# EAGLE board main_board_prev (EAGLE 8.2.2)
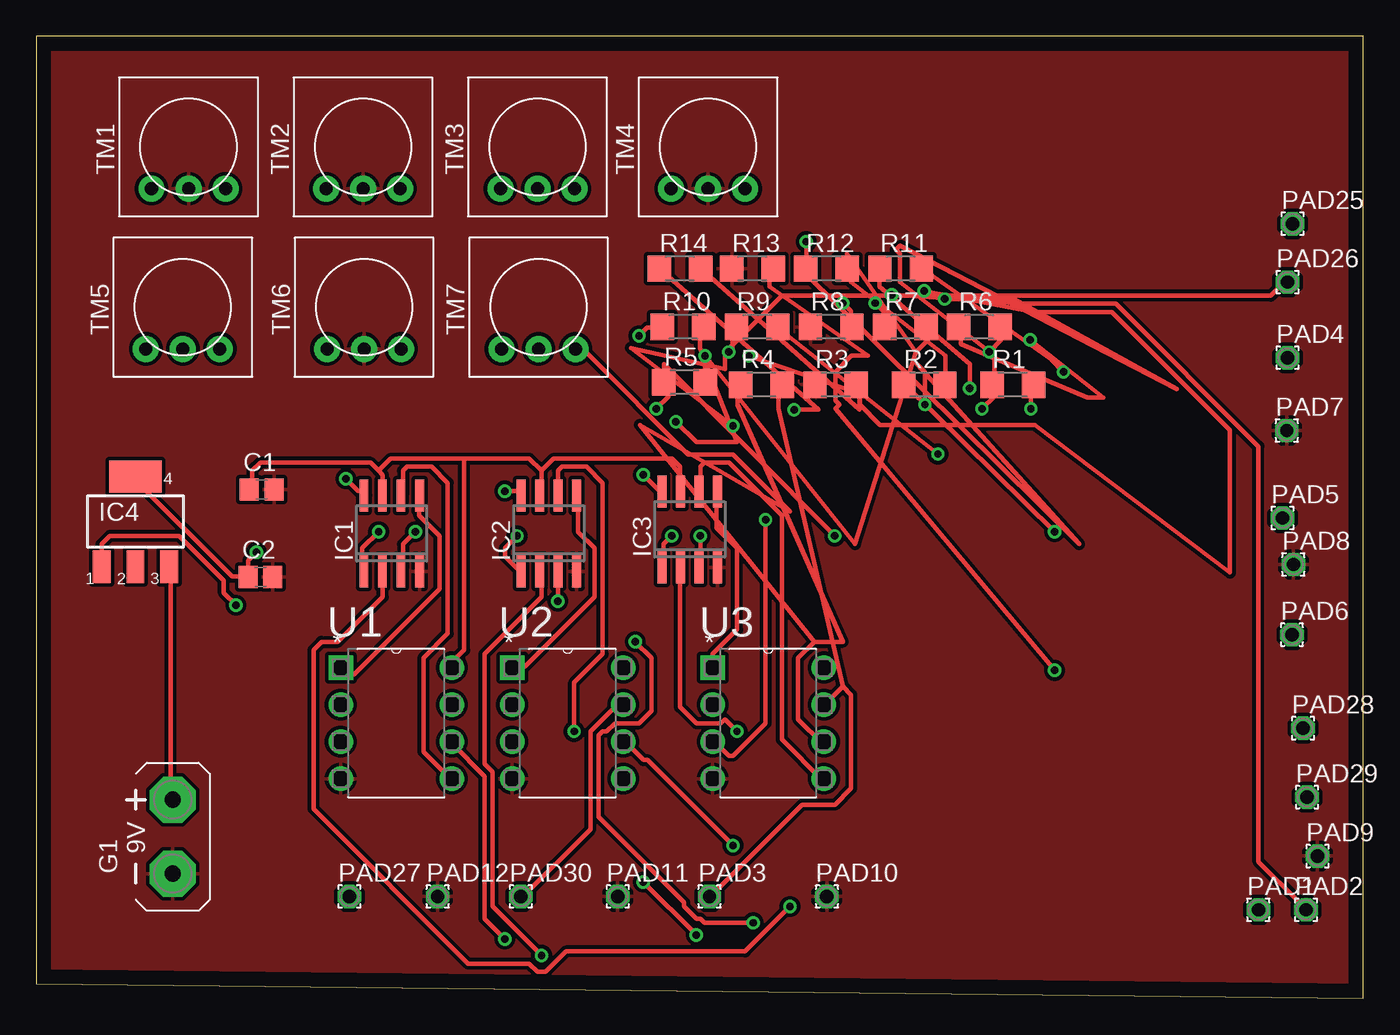
[diagram p0: board, top side]
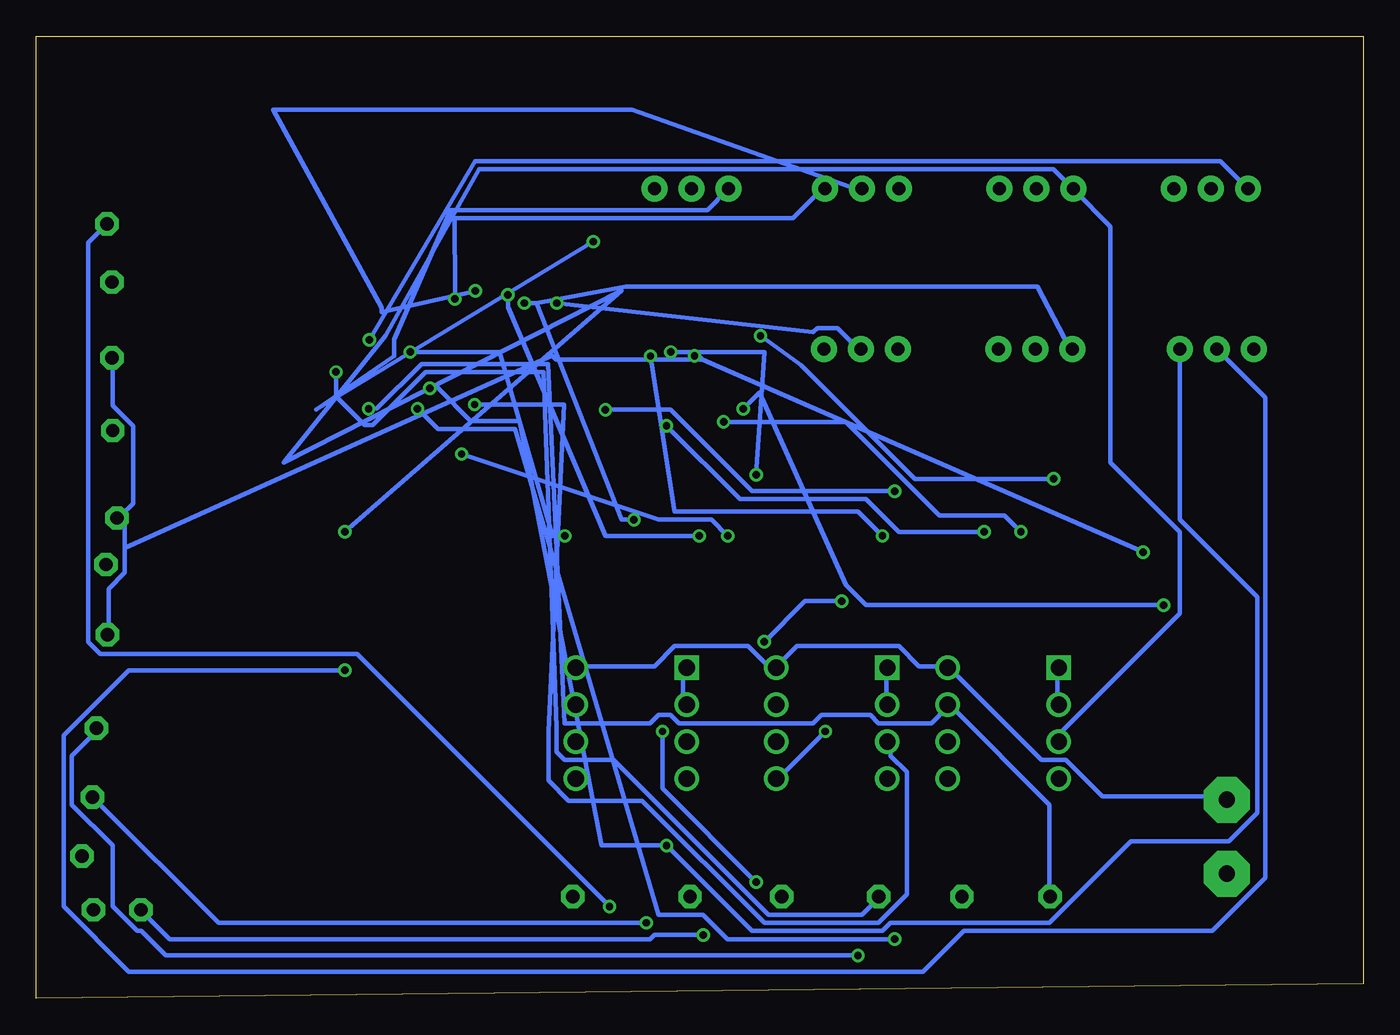
[diagram p1: board, bottom side, seen from below]

Size 91 x 66 mm. Coordinates in mm from the lower left corner, seen from the top.
Outline: 0,1 91,0 91,66 0,66 0,1
Copper layers (1*16): Top 0.035mm / dielectric 1.5mm / Bottom 0.035mm
Design rules "default": minimum track width 6mil, minimum drill 0.35mm, track to track 6mil, track to pad 6mil, pad to pad 6mil, via to via 6mil, smd to smd 6mil, copper to edge 40mil, drill to drill 6mil, minimum pad ring 10mil, minimum via ring 8mil, stop-mask expansion 4mil, vias tented up to drill 0mil, thermal gap 10mil
Net classes: 0 default: width 0.305 mm, drill 0.508 mm, clearance 0.254 mm

## Footprints (pad centres in the part's own frame; a part is rotated, then mirrored left to right if it is on the bottom)
C2012 = smd 1.3 x 1.5: 1 -0.85,0; 2 0.85,0
AB9V = drill 1.118 pad 3.15 octagon: + 0,2.54; - 0,-2.54
SOIC8 = smd 0.6 x 2.2: 1 -1.905,-2.6; 2 -0.635,-2.6; 3 0.635,-2.6; 4 1.905,-2.6; 5 1.905,2.6; 6 0.635,2.6; 7 -0.635,2.6; 8 -1.905,2.6
SOT223 = smd 1.219 x 2.235: 1 -2.311,-3.099; 2 0,-3.099; 3 2.311,-3.099 | smd 3.6 x 2.2: 4 0,3.099
1,6/0,9 = drill 0.914 pad 1.6 octagon: 1 0,0
R1206 = smd 1.6 x 1.803: 1 -1.422,0; 2 1.422,0
TRIM-3386 = drill 0.9 pad 1.778: 1 -2.54,-2.857; 2 0,-2.857; 3 2.54,-2.857
DIP254P762X508-8 = drill 1.118 square: 1 -7.62,7.62 | drill 1.118: 2 -7.62,5.08; 3 -7.62,2.54; 4 -7.62,0; 5 0,0; 6 0,2.54; 7 0,5.08; 8 0,7.62

## Placement (x,y rotation side)
C1  [C2012]  15.44,34.91 0 top
C2  [C2012]  15.36,28.91 0 top
G1  AB9V  [AB9V]  9.35,11.1 0 top
IC1  LT1168ACS8  [SOIC8]  24.37,31.91 0 top
IC2  LT1168ACS8  [SOIC8]  35.15,31.91 0 top
IC3  LT1168ACS8  [SOIC8]  44.82,32.18 0 top
IC4  317EMP  [SOT223]  6.79,32.72 0 top
PAD1  [1,6/0,9]  83.82,6.08 0 top
PAD2  [1,6/0,9]  87.09,6.08 0 top
PAD3  [1,6/0,9]  46.17,7 0 top
PAD4  [1,6/0,9]  85.82,43.96 0 top
PAD5  [1,6/0,9]  85.47,32.96 0 top
PAD6  [1,6/0,9]  86.12,24.96 0 top
PAD7  [1,6/0,9]  85.77,38.96 0 top
PAD8  [1,6/0,9]  86.22,29.77 0 top
PAD9  [1,6/0,9]  87.87,9.77 0 top
PAD10  [1,6/0,9]  54.22,7 0 top
PAD11  [1,6/0,9]  39.87,7 0 top
PAD12  [1,6/0,9]  27.52,7 0 top
PAD25  [1,6/0,9]  86.17,53.15 0 top
PAD26  [1,6/0,9]  85.82,49.15 0 top
PAD27  [1,6/0,9]  21.47,7 0 top
PAD28  [1,6/0,9]  86.88,18.54 0 top
PAD29  [1,6/0,9]  87.15,13.81 0 top
PAD30  [1,6/0,9]  33.22,7 0 top
R1  [R1206]  66.98,42.11 0 top
R2  [R1206]  60.9,42.11 0 top
R3  [R1206]  54.82,42.11 0 top
R4  [R1206]  49.74,42.11 0 top
R5  [R1206]  44.46,42.27 0 top
R6  [R1206]  64.68,46.07 0 top
R7  [R1206]  59.6,46.07 0 top
R8  [R1206]  54.52,46.07 0 top
R9  [R1206]  49.44,46.07 0 top
R10  [R1206]  44.36,46.07 0 top
R11  [R1206]  59.28,50.07 0 top
R12  [R1206]  54.2,50.07 0 top
R13  [R1206]  49.12,50.07 0 top
R14  [R1206]  44.15,50.07 0 top
TM1  [TRIM-3386]  10.43,58.42 0 top
TM2  [TRIM-3386]  22.4,58.42 0 top
TM3  [TRIM-3386]  34.37,58.42 0 top
TM4  [TRIM-3386]  46.07,58.42 0 top
TM5  [TRIM-3386]  10.04,47.42 0 top
TM6  [TRIM-3386]  22.47,47.42 0 top
TM7  [TRIM-3386]  34.44,47.42 0 top
U1  TLC272IP  [DIP254P762X508-8]  28.49,15.08 0 top
U2  TLC272IP  [DIP254P762X508-8]  40.25,15.08 0 top
U3  TLC272IP  [DIP254P762X508-8]  54.01,15.08 0 top

## Library data of the parts
C1 C2 = eagle-ltspice; SPICEMODEL: NONE; SPICEPREFIX: C
G1 = battery
IC1-IC3 = linear-technology; MPN: LT1168ACS8; OC_FARNELL: unknown; OC_NEWARK: 57M2316
IC4 = linear
PAD1-PAD12 PAD25-PAD30 = wirepad
R1-R14 TM1-TM7 = adafruit
U1-U3 = Texas Instruments_By_element14_Batch_1; MPN: TLC272IP; OC_FARNELL: 2386835; OC_NEWARK: 08F9090; PACKAGE: PDIP; SUPPLIER: Texas Instruments

## Nets
GND: C1.2 C2.2 G1.- IC1.4 IC2.4 IC3.4 PAD7.1 PAD8.1 PAD9.1 PAD10.1 PAD11.1 PAD12.1 R3.1 R8.1 R13.1 TM1.2 TM2.2 TM4.2 TM6.2 U1.4 U2.4 U3.4
N$1: PAD27.1 R1.2 U1.7
N$2: R1.1 TM3.3 U1.6
N$3: R2.1 TM2.1 U1.3
N$4: IC1.5 U1.1 U1.2
N$5: R3.2 TM3.2
N$6: IC4.1 R5.1 R6.2
N$7: PAD3.1 R4.2 U3.7
N$8: R4.1 TM7.3 U3.6
N$9: IC3.5 U3.1 U3.2
N$10: R6.1 TM1.1
N$11: R7.1 TM6.1 U3.3
N$12: IC3.1 R9.2
N$13: R8.2 TM7.2
N$14: IC3.8 R9.1
N$15: IC3.6 U3.5
N$16: IC1.1 R10.2
N$17: IC3.3 PAD2.1
N$18: IC3.2 PAD1.1
N$19: IC1.8 R10.1
N$20: IC1.6 U1.5
N$21: IC1.3 PAD26.1
N$22: IC1.2 PAD25.1
N$23: PAD30.1 R11.2 U2.7
N$24: R11.1 TM5.3 U2.6
N$25: R12.1 TM4.1 U2.3
N$26: IC2.5 U2.1 U2.2
N$27: R13.2 TM5.2
N$28: IC2.1 R14.2
N$29: IC2.8 R14.1
N$30: IC2.6 U2.5
N$31: IC2.3 PAD29.1
N$32: IC2.2 PAD28.1
VCC: C1.1 G1.+ IC1.7 IC2.7 IC3.7 IC4.3 U1.8 U2.8 U3.8
VDD: C2.1 IC4.4 PAD4.1 PAD5.1 PAD6.1 R2.2 R5.2 R7.2 R12.2

## Tracks (layer width: path | path; a pad name or v marks a point on that pad's centre or on a via)
GND
  pour Top: -5,83 -5,-3 105,-3 105,81 103,83
N$1  (via drill 0.51)
  Top 0.305: v68.21,40.46 68.21,41.86 R1.2
  Bottom 0.305: v68.21,40.46 67.65,40.46 64.58,43.54 55.92,43.54 54.76,18.88 48.9,18.88 48.34,19.44 47.5,19.44 46.94,18.88 37.72,18.88 37.16,19.44 33.81,19.44 33.25,18.88 29.62,18.88 28.5,20 U1.7 28.22,20 21.51,13.29 21.51,7.15 PAD27.1
N$2  (via drill 0.51)
  Top 0.305: v62.29,47.98 67.04,47.98 78.23,41.79 59.23,51.65 58.95,51.37 59.23,51.09 59.23,49.13 65.7,44.1 65.7,42.14 R1.1 65.7,41.86 65.7,41.3 v64.86,40.46 | v32.13,4.07 30.73,5.47 30.73,15.25 28.5,17.48 U1.6
  Bottom 0.305: v62.29,47.98 62.29,48.54 62.31,53.53 39.12,53.53 37.16,55.48 TM3.3 | v32.13,4.07 43.59,4.07 45.26,5.75 48.34,5.75 58.15,39.07 63.46,39.07 v64.86,40.46
N$3  (via drill 0.51)
  Top 0.305: v69.85,32.01 59.55,42.14 R2.1
  Bottom 0.305: v69.85,32.01 50.85,48.57 74.04,36.76 67.04,45.47 60.63,56.88 21.23,56.88 20.12,55.76 TM2.1 19.84,55.48 17.32,52.97 17.32,36.76 12.57,32.01 12.57,26.43 20.68,18.32 20.68,17.76 U1.3
N$4
  Top 0.305: IC1.5 26.26,34.25 26.26,33.13 27.66,31.73 27.66,28.1 21.79,22.23 21.23,22.23 20.95,22.51 U1.1
  Bottom 0.305: U1.2 20.95,20.28 20.95,22.51 U1.1
N$5  (via drill 0.51)
  Top 0.305: v60.89,48.54 68.45,47.1 73.76,47.1 81.86,39 81.86,29.22 68.49,39.35 57.87,39.35 56.48,40.74 56.48,41.86 R3.2
  Bottom 0.305: v60.89,48.54 67.33,47.1 67.33,47.38 74.75,60.97 50.16,60.97 34.65,55.48 TM3.2
N$6  (via drill 0.51)
  Top 0.305: v54.76,31.73 43.06,43.54 43.06,42.42 R5.1 43.06,42.14 43.34,41.86 43.34,41.3 v42.51,40.46 | v65.36,44.35 66.2,45.19 66.2,46.03 R6.2 | v13.69,26.98 12.85,27.82 12.85,28.66 9.78,31.73 5.03,31.73 4.47,31.18 4.47,29.78 IC4.1
  Bottom 0.305: v54.76,31.73 55.6,31.73 59.22,44.35 v65.36,44.35 | v13.69,26.98 34.09,26.98 35.48,28.38 41.39,41.58 v42.51,40.46
N$7
  Top 0.305: 55.32,21.4 54.2,20.28 U3.7 | 55.32,21.4 50.89,40.46 50.89,41.86 R4.2 | 55.32,21.4 55.88,20.84 55.88,14.41 54.76,13.29 52.53,13.29 46.38,7.15 PAD3.1
N$8
  Top 0.305: 53.37,24.47 55.32,24.47 48.09,40.74 48.09,41.86 R4.1 | 53.37,24.47 52.25,23.35 52.25,19.16 53.92,17.48 U3.6 | 53.37,24.47 41.39,39.35 51.69,33.41 47.78,37.32 44.7,37.32 37.72,44.31 37.16,44.31 TM7.3
N$9
  Top 0.305: IC3.5 46.66,34.53 46.66,32.29 48.06,30.9 48.06,25.31 46.38,23.63 46.38,22.79 U3.1
  Bottom 0.305: U3.2 46.66,20.28 46.66,22.51 U3.1
N$10  (via drill 0.51)
  Top 0.305: v68.16,45.19 73.2,41.23 72.08,41.23 63.41,44.91 63.41,46.03 R6.1
  Bottom 0.305: v68.16,45.19 60.91,57.44 9.78,57.44 8.1,55.76 TM1.1
N$11  (via drill 0.51)
  Top 0.305: v57.54,47.7 58.1,47.15 58.1,46.31 R7.1 | v50.01,32.85 50.01,18.88 47.78,16.65 47.5,16.65 46.66,17.48 U3.3
  Bottom 0.305: 56.7,47.7 v57.54,47.7 | 56.7,47.7 50.59,48.82 22.35,48.82 20.12,44.59 TM6.1 | v50.01,32.85 50.85,32.85 56.7,47.7
N$12  (via drill 0.51)
  Top 0.305: v61.84,37.35 50.84,46.03 R9.2 | v43.59,31.73 43.03,31.18 43.03,29.78 IC3.1
  Bottom 0.305: v61.84,37.35 48.34,32.85 44.7,32.85 v43.59,31.73
N$13  (via drill 0.51)
  Top 0.305: v55.31,47.7 55.87,47.15 55.87,46.31 R8.2
  Bottom 0.305: v55.31,47.7 37.72,45.7 37.44,45.98 36.04,45.98 34.65,44.59 TM7.2
N$14  (via drill 0.51)
  Top 0.305: v47.48,44.35 47.76,44.63 47.76,46.03 R9.1 | v41.63,35.92 42.75,34.81 IC3.8
  Bottom 0.305: v47.48,44.35 41.06,44.35 v41.63,35.92
N$15
  Top 0.305: IC3.6 45.54,34.81 45.54,36.48 45.82,36.76 47.5,36.76 51.13,33.13 51.13,17.76 53.92,14.97 U3.5
N$16  (via drill 0.51)
  Top 0.305: v43.87,39.56 45.26,38.16 48.06,38.16 45.53,44.63 45.53,46.03 R10.2 | v23.47,32.01 22.35,30.9 22.35,29.5 IC1.1
  Bottom 0.305: v43.87,39.56 35.48,39.56 29.06,33.13 24.59,33.13 v23.47,32.01
N$17  (via drill 0.51)
  Top 0.305: v45.54,31.73 45.54,29.78 IC3.3 | v58.66,48.26 59.22,48.26 67.61,47.66 74.04,47.66 83.82,37.88 83.82,9.38 86.61,6.59 86.89,6.59 87.17,6.31 PAD2.1
  Bottom 0.305: v45.54,31.73 51.97,31.73 58.66,47.42 v58.66,48.26
N$18  (via drill 0.51)
  Top 0.305: v48.06,18.32 47.22,19.16 46.94,18.88 45.26,18.88 44.15,20 44.15,29.5 IC3.2 | v45.26,4.35 v41.63,7.99
  Bottom 0.305: v48.06,18.32 48.06,14.41 v41.63,7.99 | v45.26,4.35 48.62,4.35 48.9,4.07 81.86,4.07 83.82,6.03 PAD1.1
N$19  (via drill 0.51)
  Top 0.305: v41.34,45.47 41.9,46.03 42.73,46.03 R10.1 | v21.23,35.65 22.07,34.81 22.35,34.81 22.63,34.53 IC1.8
  Bottom 0.305: v41.34,45.47 38.56,43.47 30.73,35.65 v21.23,35.65
N$20
  Top 0.305: IC1.6 25.15,34.53 25.15,36.2 25.43,36.48 27.1,36.48 28.22,35.37 28.22,25.03 26.54,23.35 26.54,16.93 27.94,15.53 28.22,15.53 28.5,15.25 U1.5
N$21  (via drill 0.51)
  Top 0.305: v25.98,32.01 25.15,31.18 25.15,29.5 IC1.3 | v47.78,39.28 40.78,44.63 47.22,43.19 47.22,44.31 51.13,48.22 84.66,48.22 85.78,49.34 PAD26.1
  Bottom 0.305: v25.98,32.01 31.85,32.01 34.09,34.25 42.75,34.25 v47.78,39.28
N$22  (via drill 0.51)
  Top 0.305: v51.69,6.31 48.62,3.23 36.32,3.23 34.92,1.84 34.37,1.84 33.81,2.4 29.62,2.4 19,13.01 19,23.91 19.56,24.47 20.68,24.47 23.75,27.54 23.75,29.22 IC1.2
  Bottom 0.305: v51.69,6.31 69.01,23.63 86.61,23.63 87.45,24.47 87.45,51.85 86.33,52.97 PAD25.1
N$23  (via drill 0.51)
  Top 0.305: v70.45,42.98 69.61,43.82 60.91,49.97 R11.2 | U2.7 40.23,20 39.67,20 38,18.32 38,11.62 33.25,6.87 PAD30.1
  Bottom 0.305: v70.45,42.98 70.45,41.3 68.49,39.35 67.93,39.35 64.3,42.98 56.2,42.98 55.32,18.6 55.32,16.93 54.76,16.37 51.41,16.37 40.79,5.75 34.37,5.75 33.25,6.87 PAD30.1
N$24  (via drill 0.51)
  Top 0.305: v64.02,41.86 64.02,43.54 57.84,48.85 57.84,49.97 R11.1 | v47.78,10.5 41.91,16.37 41.63,16.37 40.51,17.48 U2.6
  Bottom 0.305: v64.02,41.86 63.46,41.86 61.23,39.62 57.87,39.62 52.25,10.5 v47.78,10.5 41.91,4.63 32.97,4.63 32.41,5.19 21.51,5.19 15.93,10.78 9.22,10.78 7.26,12.73 7.26,27.54 12.57,32.85 12.57,44.31 TM5.3
N$25  (via drill 0.51)
  Top 0.305: v52.81,51.92 52.81,50.25 R12.1 52.53,49.97 71.53,31.18 60.39,43.54 60.95,42.98 v60.95,40.74
  Bottom 0.305: v52.81,51.92 71.81,40.4 66.48,44.07 66.48,45.19 62.59,54.09 44.98,54.09 43.59,55.48 TM4.1 | v60.95,40.74 54.8,40.74 55.88,18.32 55.88,14.97 54.48,13.57 49.45,13.57 41.07,5.19 33.25,5.19 31.29,7.15 31.29,15.53 32.41,16.65 32.41,17.48 U2.3
N$26
  Top 0.305: IC2.5 37.16,34.25 37.16,32.01 38.28,30.9 38.28,27.54 33.53,22.79 32.69,22.79 U2.1
  Bottom 0.305: U2.2 32.69,20.28 32.69,22.51 U2.1
N$27  (via drill 0.51)
  Top 0.305: v69.85,22.51 54.8,40.46 55.08,40.74 54.8,41.02 54.8,42.98 55.92,44.1 57.03,44.1 50.29,48.85 50.29,49.97 R13.2
  Bottom 0.305: v69.85,22.51 84.66,22.51 89.13,18.04 89.13,6.31 84.66,1.84 30.18,1.84 27.38,4.63 10.34,4.63 6.71,8.26 6.71,41.23 9.78,44.31 TM5.2
N$28  (via drill 0.51)
  Top 0.305: v48.88,44.07 56.44,41.51 56.44,40.4 R14.2 | v32.97,31.73 32.13,30.9 32.13,30.34 32.97,29.5 IC2.1
  Bottom 0.305: v48.88,44.07 47.22,33.41 34.65,33.41 v32.97,31.73
N$29  (via drill 0.51)
  Top 0.305: v51.97,40.4 53.65,40.4 R14.1 | v32.13,34.81 33.25,34.81 33.25,34.53 IC2.8
  Bottom 0.305: v51.97,40.4 47.5,40.4 41.91,34.81 v32.13,34.81
N$30  (via drill 0.51)
  Top 0.305: v36.88,18.32 36.88,21.68 38.84,23.63 38.84,35.37 37.72,36.48 36.04,36.48 35.76,36.2 35.76,34.53 IC2.6
  Bottom 0.305: v36.88,18.32 40.23,14.97 U2.5
N$31  (via drill 0.51)
  Top 0.305: v35.76,27.26 35.76,29.22 IC2.3 | v41.07,24.47 42.19,23.35 42.19,19.72 41.35,18.88 39.67,18.88 39.12,18.32 38.84,18.32 38.56,18.04 38.56,12.46 44.42,6.59 44.42,6.31 45.26,5.47 45.54,5.47 45.82,5.19 v49.17,5.19
  Bottom 0.305: v35.76,27.26 38.28,27.26 v41.07,24.47 | v49.17,5.19 78.51,5.19 86.89,13.57 PAD29.1
N$32  (via drill 0.51)
  Top 0.305: v34.65,2.96 31.29,6.31 31.29,15.53 30.73,16.09 30.73,23.63 34.65,27.54 34.65,29.22 IC2.2
  Bottom 0.305: v34.65,2.96 82.14,2.96 83.82,4.63 84.1,4.63 85.78,6.31 85.78,10.5 88.57,13.29 88.57,16.65 86.89,18.32 PAD28.1
VCC
  Top 0.305: 23.47,36.2 23.75,35.92 23.75,34.53 IC1.7 | 23.47,36.2 22.91,36.76 15.37,36.76 14.81,36.2 14.81,35.09 C1.1 | 34.65,36.2 34.65,34.53 IC2.7 | 34.65,36.2 33.81,37.04 29.34,37.04 | 29.34,37.04 24.31,37.04 23.47,36.2 | 34.65,36.2 35.48,37.04 43.59,37.04 44.15,36.48 44.15,34.81 IC3.7 | IC4.3 9.22,29.5 9.22,13.85 G1.+ | 29.34,37.04 29.34,23.91 28.22,22.79 U1.8
  Bottom 0.305: U3.8 53.92,22.79 48.62,22.79 47.22,24.19 42.19,24.19 40.51,22.51 U2.8 40.23,22.79 38.84,24.19 31.85,24.19 30.45,22.79 28.5,22.79 U1.8 28.22,22.51 22.07,16.37 20.4,16.37 17.88,13.85 9.5,13.85 G1.+
VDD  (via drill 0.51)
  Top 0.305: R2.2 62.34,42.14 62.34,44.1 55.88,49.13 55.88,49.97 R12.2 55.6,50.25 55.6,51.09 60.34,44.35 | 60.34,44.35 61.17,45.19 61.17,46.03 R7.2 | 60.34,44.35 56.16,31.18 v45.86,44.1 45.86,42.42 R5.2 | IC4.4 6.71,35.65 13.41,28.94 14.25,28.94 C2.1 14.53,28.94 14.53,30.06 v15.09,30.62
  Bottom 0.305: 84.94,30.9 84.94,32.57 85.22,32.85 PAD5.1 85.22,33.13 84.38,33.97 84.38,39.28 85.78,40.67 85.78,43.75 PAD4.1 | 84.94,30.9 84.94,29.22 86.06,28.1 86.06,25.03 PAD6.1 | 45.3,43.82 55.36,43.82 55.64,44.1 84.94,30.9 | 45.3,43.82 v15.09,30.62 | v45.86,44.1 45.58,44.1 45.3,43.82